# Altium PCB board.PcbDoc (part 1 of 2)
Units mm, origin at the board's own origin, x right, y up, seen from the top; angles counter-clockwise.
Board outline 36 x 151.89 mm, 2 copper layers (Top Layer, Bottom Layer), stack 1.66 mm thick; 112 components, 47 nets, 362 pads, 109 vias.
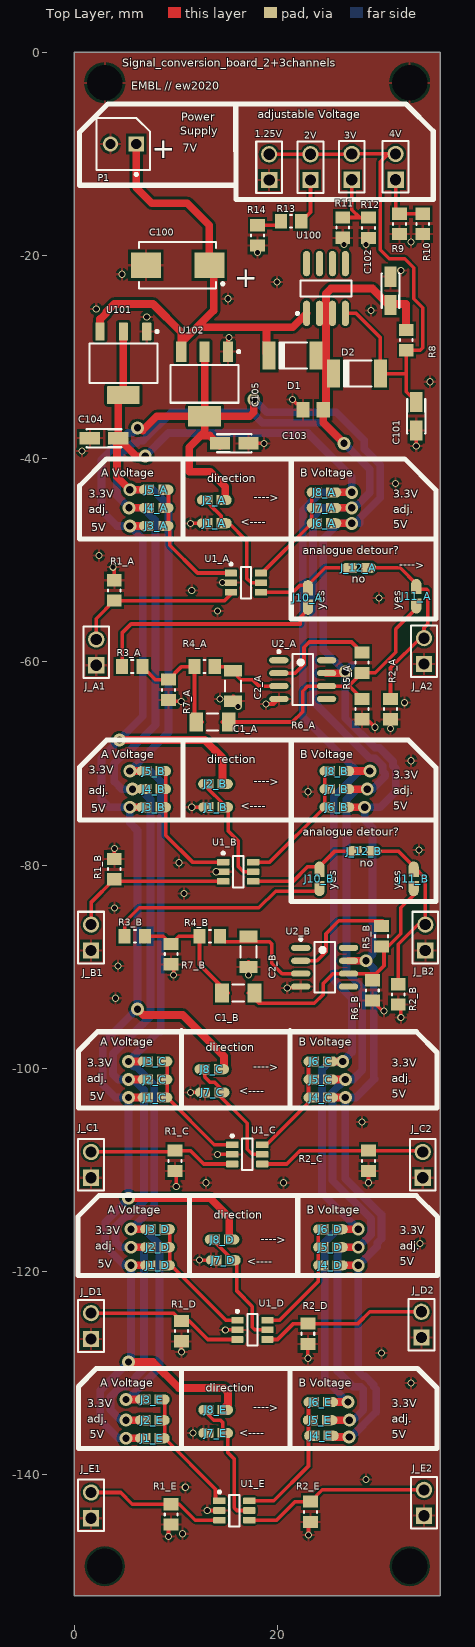
[diagram p0: Top Layer view]
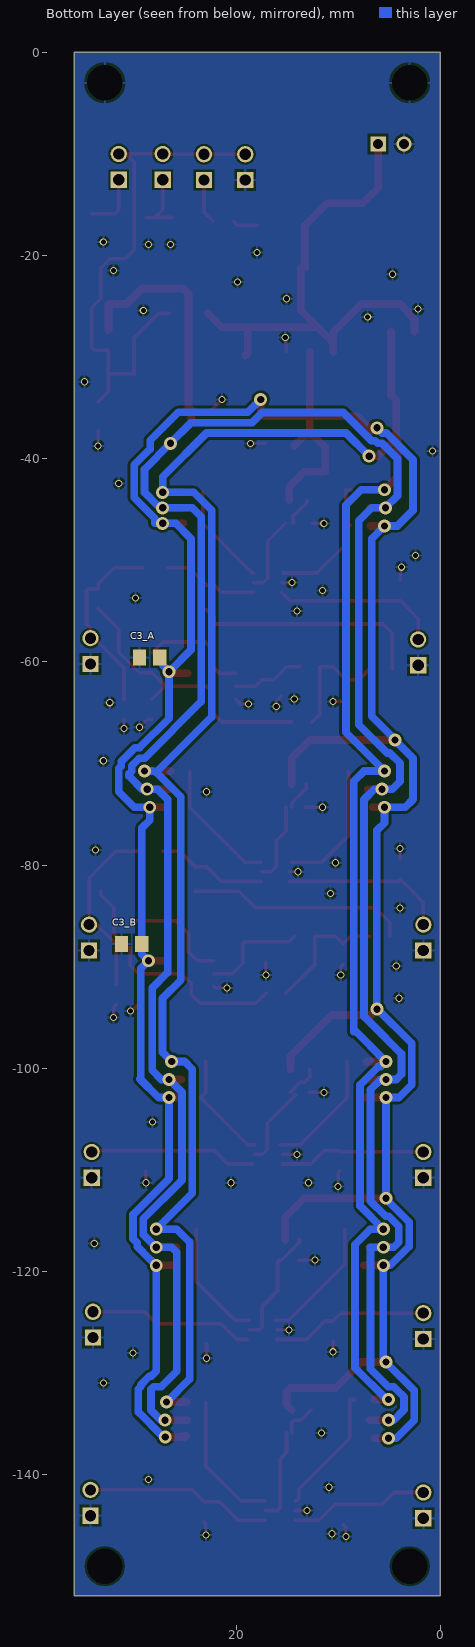
[diagram p1: Bottom Layer view, seen from below]

## Layer stack, top to bottom
Top Solder: solder mask 0.0102, Solder Resist, Dk 3.5
Top Layer: signal copper 0.055
Dielectric1: dielectric 1.55, FR-4, Dk 4.8
Bottom Layer: signal copper 0.055
Bottom Solder: solder mask 0.0102, Solder Resist, Dk 3.5

## Board outline
0,-151.892 0,0 36,0 36,-151.892

## Design rules (kind name [scope] priority, off if disabled: settings)
Clearance clearance_polygons [InNamedPolygon('top_gnd_power')or InNamedPolygon('bottom_gnd_power') vs InNamedPolygon('top_gnd_uc')or InNamedPolygon('bottom_gnd_uc')] p1: gap=1.5 ignorepadtopadclearanceinfootprint=FALSE except(0: Arc-Hole Track-Hole SMDPad-Hole THPad-Hole Via-Hole Fill-Hole Poly-Hole Region-Hole Text-Hole)
Clearance ClearanceRoom [WithinRoom('less')  or WithinRoom('less1') or WithinRoom('less2') or WithinRoom('less3') or WithinRoom('less4')] p2: gap=0.203 ignorepadtopadclearanceinfootprint=FALSE except(0: Arc-Hole Track-Hole SMDPad-Hole THPad-Hole Via-Hole Fill-Hole Poly-Hole Region-Hole Text-Hole)
Clearance clearance_HP_class [InNetClass('high_power_net')] p3: gap=0.381 ignorepadtopadclearanceinfootprint=FALSE except(0: Arc-Hole Track-Hole SMDPad-Hole THPad-Hole Via-Hole Fill-Hole Poly-Hole Region-Hole Text-Hole)
Clearance "clearance_24V class" [InNetClass('24V_net')] p4: gap=0.254 ignorepadtopadclearanceinfootprint=FALSE except(0: Arc-Hole Track-Hole SMDPad-Hole THPad-Hole Via-Hole Fill-Hole Poly-Hole Region-Hole Text-Hole)
Clearance Clearance_1 [All] p5: gap=0.203 ignorepadtopadclearanceinfootprint=FALSE except(0: Arc-Hole Track-Hole SMDPad-Hole THPad-Hole Via-Hole Fill-Hole Poly-Hole Region-Hole Text-Hole)
FabricationTestPointUsage TestPointUsage [All] p1: valid=0 allowmultiple=FALSE
FabricationTestpoint Testpoint [All] p1: side=3 testpointundercomponent=TRUE minsize=1.016 maxsize=2.54 preferedsize=1.524 minholesize=0 maxholesize=1.016 preferedholesize=0.813 testpointgrid=0.025 allowsidetop=TRUE allowsidebottom=TRUE usegrid=TRUE gridtolerance=0
HoleSize [All] p1: absolutevalues=TRUE maxlimit=6 minlimit=0.025 maxpercent=80.000 minpercent=20.000
PolygonConnect PolygonConnect_Power [(InNet('+5V') OR InNet('-24VBUS'))] p1: connectstyle=Relief reliefconductorwidth=2.54 reliefentries=4 polygonreliefangle="90 Angle" airgapwidth=0.254
PolygonConnect [All] p2: connectstyle=Relief reliefconductorwidth=0.254 reliefentries=4 polygonreliefangle="90 Angle" airgapwidth=0.254
RoutingVias [All] p1: holewidth=0.711 width=1.27 viastyle="Through Hole" minholewidth=0.711 minwidth=1.27 maxholewidth=0.711 maxwidth=1.27
SilkToSolderMaskClearance SilkscreenOverComponentPads [IsPad] p1: minsilkscreentomaskgap=0.254 clearancetoexposedcopper=TRUE
SolderMaskExpansion [All] p1: expansion=0.102 istentingtop=FALSE
Width WidthRoom [WithinRoom('less')  or WithinRoom('less1') or WithinRoom('less2') or WithinRoom('less3') or WithinRoom('less4')] p1: maxlimit=0.356 minlimit=0.356 preferedwidth=0.356
Width Width_HC_class [InNetClass('High_Current_net')] p2: maxlimit=15.24 minlimit=1.524 preferedwidth=1.524
Width Width_HP_class [InNetClass('High_Power_net')] p3: maxlimit=1.016 minlimit=1.016 preferedwidth=1.016
Width "Width_24V class" [InNetClass('24V_net')] p4: maxlimit=0.762 minlimit=0.762 preferedwidth=0.762
Width Width_1 [All] p5: maxlimit=0.356 minlimit=0.356 preferedwidth=0.356
26 further rules are at their usual default settings.

## Classes and differential pairs
component class B: C1_B C2_B C3_B J1_B J2_B J3_B J4_B J5_B J6_B J7_B J8_B J10_B J11_B J_12_B R1_B R2_B R3_B R4_B R5_B R6_B R7_B U1_B U2_B
component class A: C1_A C2_A C3_A J1_A J2_A J3_A J4_A J5_A J6_A J7_A J8_A J10_A J11_A J_12_A R1_A R2_A R3_A R4_A R5_A R6_A R7_A U1_A U2_A
channel class Sheet1: Designator Designator2
net class 24V_net: +3,3V +4V +5V +7V
component class sheetPower: 1.25V 2V 3V 4V C100 C101 C102 C103 C104 C105 D1 D2 P1 R8 R9 R10 R11 R12 R13 R14 U100 U101 U102
component class sheet_top: J_A1 J_A2 J_B1 J_B2 J_B6 J_C1 J_C2 J_D1 J_D2 J_E1 J_E2
component class E: J1_E J2_E J3_E J4_E J5_E J6_E J7_E J8_E R1_E R2_E U1_E
component class D: J1_D J2_D J3_D J4_D J5_D J6_D J7_D J8_D R1_D R2_D U1_D
component class C: J1_C J2_C J3_C J4_C J5_C J6_C J7_C J8_C R1_C R2_C U1_C
channel class Sheet2: C D E

## Components (designator, comment, footprint, x,y, rotation, side; value= is the part's Value field where it differs from the comment)
1.25V "61300211121" 61300211121 19.177,-12.573 r90 top
2V "61300211121" 61300211121 23.241,-12.573 r90 top
3V "61300211121" 61300211121 27.305,-12.54 r90 top
4V "61300211121" 61300211121 31.623,-12.54 r90 top
C1_A "2.2uF" CAPC1206(3216)190_M 13.589,-65.913 r0 top (schematic designator C1)
C1_B "2.2uF" CAPC1206(3216)190_M 16.129,-92.583 r0 top (schematic designator C1)
C2_A "1uF" CAPC1206(3216)190_N 15.621,-62.357 r90 top (schematic designator C2)
C2_B "1uF" CAPC1206(3216)190_N 17.145,-88.519 r90 top (schematic designator C2)
C3_A "100nF" CAPC2013X88X50ML20T25 28.591,-59.563 r180 bottom (schematic designator C3)
C3_B "100nF" CAPC2013X88X50ML20T25 30.353,-87.757 r180 bottom (schematic designator C3)
C100 "10 µF" KEMT-520-D_Low 10.16,-20.955 r180 top
C101 "4,7 µF" "A Package" 33.655,-34.411 r270 top
C102 "4,7 µF" "A Package" 31.115,-24.875 r90 top
C103 "100nF" CAPC2013X88X50ML20T25 23.495,-35.179 r0 top
C104 "4,7 µF" "A Package" 4.324,-37.973 r180 top
C105 "4,7 µF" "A Package" 14.345,-38.481 r0 top
D1 "LL4007" LL4007 23.777,-29.845 r180 top
D2 "LL4007" LL4007 30.127,-31.623 r180 top
J1_A "normal solderbridge" PCBComponent 14.986,-46.355 r270 top (schematic designator J1)
J1_B "normal solderbridge" PCBComponent 15.113,-74.295 r270 top (schematic designator J1)
J1_C "normal solderbridge" PCBComponent 9.144,-102.87 r270 top (schematic designator J1)
J1_D "normal solderbridge" PCBComponent 9.398,-119.38 r270 top (schematic designator J1)
J1_E "normal solderbridge" PCBComponent 8.89,-136.398 r270 top (schematic designator J1)
J2_A "normal solderbridge" PCBComponent 14.986,-44.069 r270 top (schematic designator J2)
J2_B "normal solderbridge" PCBComponent 15.097,-72.009 r270 top (schematic designator J2)
J2_C "normal solderbridge" PCBComponent 6.731,-101.092 r90 top (schematic designator J2)
J2_D "normal solderbridge" PCBComponent 6.985,-117.602 r90 top (schematic designator J2)
J2_E "normal solderbridge" PCBComponent 6.477,-134.62 r90 top (schematic designator J2)
J3_A "normal solderbridge" PCBComponent 9.271,-46.609 r270 top (schematic designator J3)
J3_B "normal solderbridge" PCBComponent 9.017,-74.295 r270 top (schematic designator J3)
J3_C "normal solderbridge" PCBComponent 9.144,-99.314 r270 top (schematic designator J3)
J3_D "normal solderbridge" PCBComponent 9.398,-115.824 r270 top (schematic designator J3)
J3_E "normal solderbridge" PCBComponent 8.89,-132.588 r270 top (schematic designator J3)
J4_A "normal solderbridge" PCBComponent 6.858,-44.831 r90 top (schematic designator J4)
J4_B "normal solderbridge" PCBComponent 6.604,-72.517 r90 top (schematic designator J4)
J4_C "normal solderbridge" PCBComponent 23.051,-102.87 r90 top (schematic designator J4)
J4_D "normal solderbridge" PCBComponent 24.003,-119.38 r90 top (schematic designator J4)
J4_E "normal solderbridge" PCBComponent 23.114,-136.144 r90 top (schematic designator J4)
J5_A "normal solderbridge" PCBComponent 9.271,-43.053 r270 top (schematic designator J5)
J5_B "normal solderbridge" PCBComponent 9.017,-70.739 r270 top (schematic designator J5)
J5_C "normal solderbridge" PCBComponent 25.464,-101.092 r270 top (schematic designator J5)
J5_D "normal solderbridge" PCBComponent 26.416,-117.602 r270 top (schematic designator J5)
J5_E "normal solderbridge" PCBComponent 25.4,-134.62 r270 top (schematic designator J5)
J6_A "normal solderbridge" PCBComponent 23.368,-46.355 r90 top (schematic designator J6)
J6_B "normal solderbridge" PCBComponent 24.638,-74.295 r90 top (schematic designator J6)
J6_C "normal solderbridge" PCBComponent 23.051,-99.314 r90 top (schematic designator J6)
J6_D "normal solderbridge" PCBComponent 24.003,-115.824 r90 top (schematic designator J6)
J6_E "normal solderbridge" PCBComponent 23.051,-132.842 r90 top (schematic designator J6)
J7_A "normal solderbridge" PCBComponent 25.781,-44.831 r270 top (schematic designator J7)
J7_B "normal solderbridge" PCBComponent 27.051,-72.517 r270 top (schematic designator J7)
J7_C "normal solderbridge" PCBComponent 14.781,-102.362 r270 top (schematic designator J7)
J7_D "normal solderbridge" PCBComponent 15.875,-118.872 r270 top (schematic designator J7)
J7_E "normal solderbridge" PCBComponent 15.113,-135.89 r270 top (schematic designator J7)
J8_A "normal solderbridge" PCBComponent 23.368,-43.307 r90 top (schematic designator J8)
J8_B "normal solderbridge" PCBComponent 24.638,-70.739 r90 top (schematic designator J8)
J8_C "normal solderbridge" PCBComponent 14.732,-100.076 r270 top (schematic designator J8)
J8_D "normal solderbridge" PCBComponent 15.748,-116.84 r270 top (schematic designator J8)
J8_E "normal solderbridge" PCBComponent 15.113,-133.604 r270 top (schematic designator J8)
J10_A "normal solderbridge" PCBComponent 22.987,-54.864 r180 top (schematic designator J10)
J10_B "normal solderbridge" PCBComponent 24.13,-82.55 r180 top (schematic designator J10)
J11_A "normal solderbridge" PCBComponent 33.655,-54.737 r180 top (schematic designator J11)
J11_B "normal solderbridge" PCBComponent 33.401,-82.55 r180 top (schematic designator J11)
J_12_A "normal solderbridge" PCBComponent 29.21,-50.739 r270 top (schematic designator J_12)
J_12_B "normal solderbridge" PCBComponent 29.718,-78.613 r270 top (schematic designator J_12)
J_A1 "61300211121" 61300211121 2.159,-60.325 r90 top
J_A2 "61300211121" 61300211121 34.417,-60.198 r90 top
J_B1 "61300211121" 61300211121 1.651,-88.392 r90 top
J_B2 "61300211121" 61300211121 34.544,-88.392 r90 top
J_C1 "61300211121" 61300211121 1.651,-110.76 r90 top
J_C2 "61300211121" 61300211121 34.29,-110.76 r90 top
J_D1 "61300211121" 61300211121 1.651,-126.623 r90 top
J_D2 "61300211121" 61300211121 34.163,-126.492 r90 top
J_E1 "61300211121" 61300211121 1.651,-144.272 r90 top
J_E2 "61300211121" 61300211121 34.417,-144.018 r90 top
P1 "12V" 66100211622 6.096,-9.017 r0 top
R1_A "10k" YAGO-RC0805_M 3.937,-52.959 r270 top (schematic designator R1)
R1_B "10k" YAGO-RC0805_M 3.937,-80.391 r270 top (schematic designator R1)
R1_C "10k" YAGO-RC0805_M 9.906,-109.093 r90 top (schematic designator R1)
R1_D "10k" YAGO-RC0805_M 10.541,-125.857 r90 top (schematic designator R1)
R1_E "10k" YAGO-RC0805_M 9.525,-143.891 r90 top (schematic designator R1)
R2_A "10k" YAGO-RC0805_M 31.115,-64.643 r90 top (schematic designator R2)
R2_B "10k" YAGO-RC0805_M 31.877,-92.71 r90 top (schematic designator R2)
R2_C "10k" YAGO-RC0805_M 28.956,-109.093 r90 top (schematic designator R2)
R2_D "10k" YAGO-RC0805_M 22.987,-126.111 r90 top (schematic designator R2)
R2_E "10k" YAGO-RC0805_M 23.241,-143.637 r90 top (schematic designator R2)
R3_A "10k" YAGO-RC0805_M 5.699,-60.452 r180 top (schematic designator R3)
R3_B "10k" YAGO-RC0805_M 5.953,-86.995 r180 top (schematic designator R3)
R4_A "10k" YAGO-RC0805_M 12.827,-60.452 r180 top (schematic designator R4)
R4_B "10k" YAGO-RC0805_M 13.335,-86.995 r180 top (schematic designator R4)
R5_A "0" YAGO-RC0805_M 28.321,-60.071 r270 top (schematic designator R5)
R5_B "0" YAGO-RC0805_M 30.226,-86.995 r270 top (schematic designator R5)
R6_A "open" YAGO-RC0805_M 28.321,-64.643 r270 top (schematic designator R6)
R6_B "open" YAGO-RC0805_M 29.337,-92.329 r270 top (schematic designator R6)
R7_A "open" YAGO-RC0805_M 9.271,-62.738 r270 top (schematic designator R7)
R7_B "open" YAGO-RC0805_M 9.525,-88.757 r270 top (schematic designator R7)
R8 "1k" YAGO-RC0805_M 32.655,-28.321 r90 top
R9 "56k" YAGO-RC0805_M 32.004,-16.891 r90 top
R10 "2k7" YAGO-RC0805_M 34.29,-16.891 r90 top
R11 "2k7" YAGO-RC0805_M 26.416,-17.256 r90 top
R12 "2k7" YAGO-RC0805_M 28.956,-17.272 r90 top
R13 "560" YAGO-RC0805_M 21.336,-16.637 r0 top
R14 "15" YAGO-RC0805_M 18.034,-18.018 r90 top
U1_A "SN74LVC1T45DBVT" DBV0006A_M 16.891,-52.197 r0 top (schematic designator U1)
U1_B "SN74LVC1T45DBVT" DBV0006A_M 16.129,-80.645 r0 top (schematic designator U1)
U1_C "SN74LVC1T45DBVT" DBV0006A_M 17.018,-108.458 r0 top (schematic designator U1)
U1_D "SN74LVC1T45DBVT" DBV0006A_M 17.526,-125.73 r0 top (schematic designator U1)
U1_E "SN74LVC1T45DBVT" DBV0006A_M 15.748,-143.51 r0 top (schematic designator U1)
U2_A "AD8029ARZ" ADI-R-8_L 22.479,-61.738 r0 top (schematic designator U2)
U2_B "AD8029ARZ" ADI-R-8_L 24.638,-90.043 r0 top (schematic designator U2)
U100 "LM317LM" M08A_M 24.765,-23.241 r90 top
U101 "LM1117IMP-3.3/NOPB" DCY0004A_N 4.826,-30.607 r270 top
U102 "LM1117IMP-5.0/NOPB" DCY0004A_M 12.827,-32.639 r270 top

## Footprints (in the part's own frame and the unit in brackets; to place one, negate y for a bottom-side part, rotate by r counter-clockwise, add the part's x,y. Pads: shape width x height; smd on the part's side, far side on the other; paste and mask are expansions set on the pad)
61300211121 [mm] "2Pol; gerade; WR-PHD 2.54 mm THT Pin Header"
  rect 1.6x1.6 hole 1.1: 1(0,0)
  round 1.6 hole 1.1: 2(2.54,0)
  silkscreen extent -1.27,-1.27 3.81,1.27, body extent -1.27,-1.27 3.81,1.27, height 8.57
66100211622 [mm] "2 Pins, stehend 2.54mm Intercom Stiftleiste WR-WTB"
  rect 1.5x1.5 hole 1: 1(0,0)
  round 1.5 hole 1: 2(-2.54,0)
  silkscreen extent -3.91,-3.12 1.37,2.55, body extent -3.66,-2.5 1.12,2.5, height 11.33
"A Package" [mm] "A Package; Low Density"
  rect 2x1.2 smd: 1(0,0) 2(2.8,0)
  silkscreen extent -0.3,-0.9 3.1,0.9
ADI-R-8_L [mm] "SOIC, 8-Leads, Body 4.9x3.9mm, Pitch 1.27mm, IPC High Density"
  oval 1.9x0.6 smd: 1(-2.35,1.905) 2(-2.35,0.635) 3(-2.35,-0.635) 4(-2.35,-1.905) 5(2.35,-1.905) 6(2.35,-0.635) 7(2.35,0.635) 8(2.35,1.905)
  silkscreen extent -2.47,-2.5 1,2.88, body extent -2,-2.5 2,2.5, height 1.75
CAPC1206(3216)190_M [mm] "Chip Capacitor, Body 3.2x1.6mm, Height 1.9mm, IPC Low Density"
  rect 1.35x1.9 smd: 1(-1.6,0) 2(1.6,0)
  silkscreen extent -0.55,-0.85 0.55,0.85, body extent -1.7,-0.9 1.7,0.9, height 1.9
CAPC1206(3216)190_N [mm] "Chip Capacitor, Body 3.2x1.6mm, Height 1.9mm, IPC Medium Density"
  rect 1.15x1.8 smd: 1(-1.5,0) 2(1.5,0)
  silkscreen extent -0.55,-0.8 0.55,0.8, body extent -1.7,-0.9 1.7,0.9, height 1.9
CAPC2013X88X50ML20T25 [mm] "Chip Capacitor, 2-Leads, Body 2.00x1.25mm, IPC Low Density"
  rect 1.3x1.55 smd: 1(-1,0) 2(1,0)
  body extent -1.1,-0.72 1.1,0.72, height 0.88
DBV0006A_M [mm] "SOT23, 6-Leads, Body 3.05x1.75mm, Pitch 0.95mm, IPC Low Density"
  rrect15% 1.2x0.65 smd: 1(-1.475,0.95) 2(-1.475,0) 3(-1.475,-0.95) 4(1.475,-0.95) 5(1.475,0) 6(1.475,0.95)
  silkscreen extent -1.6,-1.55 0.5,1.95, body extent -1.42,-1.46 1.42,1.46, height 1.11
DCY0004A_M [mm] "SOT223, 4-Leads, Body 6.7x3.7mm, Pitch 2.3mm, IPC Low Density"
  rrect10% 2.05x1 smd: 1(-3.175,2.3) 2(-3.175,0) 3(-3.175,-2.3)
  rrect5% 2.05x3.25 smd: 4(3.175,0)
  silkscreen extent -3.3,-3.35 1.85,3.48, body extent -3.5,-3.25 3.5,3.25, height 1.62
DCY0004A_N [mm] "SOT223, 4-Leads, Body 6.7x3.7mm, Pitch 2.3mm, IPC Medium Density"
  rrect11% 1.75x0.9 smd: 1(-3.125,2.3) 2(-3.125,0) 3(-3.125,-2.3)
  rrect6% 1.75x3.2 smd: 4(3.125,0)
  silkscreen extent -3.25,-3.35 1.95,3.43, body extent -3.5,-3.25 3.5,3.25, height 1.62
KEMT-520-D_Low [mm] "Molded Capacitor, 2-Leads, Body 7.6x4.6mm, IPC Low Density"
  rect 2.95x2.55 smd: 1(-3.125,0) 2(3.125,0)
  silkscreen extent -4.58,-2.3 3.8,2.3, body extent -4.02,-2.3 4.02,2.3, height 3.1
LL4007 [mm] "MELF Diode, 2-Leads, Body 5,00x2,50mm, IPC High Density"
  rect 1.279x2.75 smd: 1(0,0) 2(4.6,0)
  silkscreen extent 0.9,-1.28 3.57,1.28, body extent -0.3,-1.34 4.9,1.35, height 2.69
M08A_M [mm] "SOIC, 8-Leads, Body 4.9x3.9mm, Pitch 1.27mm, IPC Low Density"
  oval 2.5x0.7 smd: 1(-2.45,1.905) 2(-2.45,0.635) 3(-2.45,-0.635) 4(-2.45,-1.905) 5(2.45,-1.905) 6(2.45,-0.635) 7(2.45,0.635) 8(2.45,1.905)
  silkscreen extent -2.57,-2.5 0.8,2.93, body extent -2,-2.5 2,2.5, height 1.75
PCBComponent [mm]
  round 1 smd paste+0: 1(0,0) 2(0,-2.413)
  rect 1x1 smd paste+0: 1(0,-0.508) 2(0,-1.905)
YAGO-RC0805_M [mm] "Chip Resistor, 2-Leads, Body 2.00x1.25mm, IPC Low Density"
  rect 1.2x1.45 smd: 1(-1,0) 2(1,0)
  silkscreen extent -0.1,-0.63 0.1,0.63, body extent -1,-0.62 1,0.63, height 0.6

## Part data
1.25V 2V 3V 4V J_A1 J_A2 J_B1 J_B2 J_C1 J_C2 J_D1 J_D2 J_E1 J_E2: library part CMP-001-0071-1, "2Pol; gerade; WR-PHD 2.54 mm THT Pin Header", Current Rating="3 A", Flammability Rating="UL 94 V-0", Insulation Resistance="1 GOhms", Manufacturer="Wurth Electronics", Supplier Part Number=710-61300211121, Voltage Rating="250 V", Accessory Type=-, Application="Wire to Board", Brand="Wurth Electronics", ComponentLink1Description=6130xx11121-538006.pdf, ComponentLink1URL=http://www.mouser.com/ds/2/445/6130xx11121-538006.pdf, Contact Gender="Pin (Male)", Contact Material="Copper Alloy", Contact Plating=Gold, Contact Type=-, Housing Gender=-, Housing Material="Polybutylene Terephthalate (PBT)", Latching Type=Unlatched, Manufacturer Part Number=61300211121, Mating Post Length="6 mm", Minimum Order Quantity=1, Mounting Angle=Straight, Mounting Style="Straight Pin", Number of Positions="2 Position", Number of Rows="1 Row", Packaging=Bulk, PartNumber=61300211121, Pitch="2.54 mm", Product=Headers, Reeling=False, RoHS - Mouser=Y, Row Spacing=-, Series=WR-PHD, Standard Pack Qty=1000, Supplier=Mouser, Termination Post Length="3 mm", Termination Style="Through Hole", Type="Pin Strip"
C1_A C1_B: library part CMP-001-0162-A.1, "CAP CER 2.2UF 10V X7R 1206", Case/Package=1206, Case Code (Metric)=3216, Manufacturer="Wurth Electronics", Max Operating Temperature=125°C, Min Operating Temperature=-55°C, PartNumber=885012208015, Supplier Part Number=710-885012208015, Tolerance=10%, Voltage Rating=10V, Capacitance=2.2uF, Case Code (Imperial)=1206, ComponentLink1Description=885012208015.pdf?src-supplier=Digi-Key, ComponentLink1URL=https://katalog.we-online.de/pbs/datasheet/885012208015.pdf?src-supplier=Digi-Key, ComponentLink2Description=2031893.pdf?src-supplier=Farnell, ComponentLink2URL=http://www.farnell.com/datasheets/2031893.pdf?src-supplier=Farnell, Length=0.126inch, Mount="Surface Mount", Packaging="Tape and Reel", Supplier=Mouser, Thickness=0.051inch, Width=0.063inch
C2_A C2_B: library part CMP-001-0138-A.2, "CAP CER 1UF 10V X7R 1206", Manufacturer="Wurth Electronics Inc.", Manufacturer Part Number=885012208013, Operating Temperature="-55°C ~ 125°C", Package / Case="1206 (3216 Metric)", Ratings=-, Supplier Part Number=732-7685-1-ND, Temperature Coefficient=X7R, Tolerance=±10%, Voltage - Rated=10V, Applications="General Purpose", ComponentLink1Description=885012208013.pdf, ComponentLink1URL=http://katalog.we-online.de/pbs/datasheet/885012208013.pdf, Features=-, Height - Seated (Max)=-, Lead Spacing=-, Lead Style=-, Mounting Type="Surface Mount, MLCC", Notification="Current market demand for these product types have resulted in fluctuating and extending lead times. Lead times may differ.", Packaging="Cut Tape (CT)", PartNumber=885012208013, Part Status=Active, Size / Dimension="0.126\" L x 0.063\" W (3.20mm x 1.60mm)", Supplier=Digi-Key, Thickness (Max)="0.051\" (1.30mm)"
C3_A C3_B C103: library part CMP-001-0082-2, "generic 0805 COG oder X7R Vielschichtkondensatoren max. +/-10%"
C100: library part CMP-001-0033-3, "10 µF, 35V, 125 mOhm, Gr. D / partnumb: T495D106K035ATE125", Capacitance=10µF, ESR (Equivalent Series Resistance)="125 mOhm", Lifetime @ Temp.="2000 Hrs @ 85°C", Manufacturer=KEMET, Manufacturer Size Code=D, Operating Temperature="-55°C ~ 125°C", Package / Case="2917 (7343 Metric)", PartNumber=T495D106K035ATE125, Supplier Part Number=399-10292-1-ND, Tolerance=±10%, Voltage - Rated=35V, ComponentLink1Description=docfinder?Partnumber=T495D106K035ATE300, ComponentLink1URL=http://www.kemet.com/docfinder?Partnumber=T495D106K035ATE300, Failure Rate=-, Features="General Purpose", Height - Seated (Max)="0.122\" (3.10mm)", Lead Spacing=-, Mounting Type="Surface Mount", Packaging="Cut Tape (CT)", Part Status=Active, Size / Dimension="0.287\" L x 0.169\" W (7.30mm x 4.30mm)", Supplier=Digi-Key, Type=Molded
C101 C102 C104 C105: library part CMP-001-0039-3, "4,7 µF; 6V; Gr. A; T491A475K006AT", Capacitance=4.7µF, ESR (Equivalent Series Resistance)="6 Ohm", Lifetime @ Temp.="2000 Hrs @ 85°C", Manufacturer=KEMET, Manufacturer Size Code=A, Operating Temperature="-55°C ~ 125°C", Package / Case="1206 (3216 Metric)", PartNumber=T491A475K006AT, Supplier Part Number=399-9717-1-ND, Tolerance=±10%, Voltage - Rated=6.3V, ComponentLink1Description=KEM_T2005_T491.pdf, ComponentLink1URL=http://www.kemet.com/Lists/ProductCatalog/Attachments/254/KEM_T2005_T491.pdf, Failure Rate=-, Features="General Purpose", Height - Seated (Max)="0.071\" (1.80mm)", Lead Spacing=-, Mounting Type="Surface Mount", Packaging="Cut Tape (CT)", Part Status=Active, Size / Dimension="0.126\" L x 0.063\" W (3.20mm x 1.60mm)", Supplier=Digi-Key, Type=Molded
D1 D2: library part CMP-001-0049-2, "LL4007;  Vf 1,1V @ 1A, If = 1A", Betriebstemperatur, max.=175, Manufacturer="TAIWAN SEMICONDUCTOR", PartNumber="LL4007G L2", Supplier Part Number=2677381, Anzahl der Pins=-, Bauform - Diode=DO-213, ComponentLink1Description=2182652.pdf, ComponentLink1URL=http://www.farnell.com/datasheets/2182652.pdf, Diodenkonfiguration=Einfach, Durchlassspannung Vf max.=1.1, Durchlassstrom (mittlerer) If(AV)=1, Periodische Sperrspannung Vrrm, max.=1, Produktpalette=-, Sperrerholzeit Trr, max.=-, Spitzendurchlassstrom Ifsm, max.=25, Supplier=Farnell, SVHC="No SVHC (20-Jun-2016", Verpackung=Gurtabschnitt
J1_A J1_B J1_C J1_D J1_E J2_A J2_B J2_C J2_D J2_E J3_A J3_B J3_C J3_D J3_E J4_A J4_B J4_C J4_D J4_E J5_A J5_B J5_C J5_D J5_E J6_A J6_B J6_C J6_D J6_E J7_A J7_B J7_C J7_D J7_E J8_A J8_B J8_C J8_D J8_E J10_A J10_B J11_A J11_B J_12_A J_12_B: library part CMP-001-0133-A.1
P1: library part CMP-001-0161-A.3, "WR-WTB 2.54 mm Male Vertical Shrouded Header 2 Pins", Manufacturer="Wurth Electronics", PartNumber=66100211622, Supplier Part Number=732-14102-ND, Supplier=Digi-Key
R1_A R1_B R1_C R1_D R1_E R2_A R2_B R2_C R2_D R2_E R3_A R3_B R4_A R4_B R5_A R5_B R6_A R6_B R7_A R7_B R8 R9 R10 R11 R12 R13 R14: library part CMP-001-0027-2, "0805 Yageo Standard BlackBox Resistors", Manufacturer=Yageo, Operating Temperature="-55°C ~ 155°C", Package / Case="0805 (2012 Metric)", Power (Watts)="0.125W, 1/8W", Supplier Device Package=0805, Temperature Coefficient=±200ppm/°C, Tolerance=±1%, ComponentLink1Description=PYu-RC_Group_51_RoHS_L_7.pdf, ComponentLink1URL=http://www.yageo.com/documents/recent/PYu-RC_Group_51_RoHS_L_7.pdf, Composition="Thick Film", Failure Rate=-, Features="Moisture Resistant", Height - Seated (Max)="0.024\" (0.60mm)", Packaging=Digi-Reel®, Part Status=Active, Size / Dimension="0.079\" L x 0.049\" W (2.00mm x 1.25mm)"
U1_A U1_B U1_C U1_D U1_E: library part CMP-00491-2, "Single-Bit Dual-Supply Bus Transceiver with Configurable Voltage Translation and 3-State Outputs, DBV0006A, SMALL T&R", F @ Nom Voltage(Max)(Mhz)=150, Generic Part Number=SN74LVC1T45, ICC @ Nom Voltage(Max)(mA)=0.004, Manufacturer="Texas Instruments", Operating Temperature Range(C)="-40 to 85", PartNumber=SN74LVC1T45DBVTG4, Rating=Catalog, tpd @ Nom Voltage(Max)(ns)=15.5,8,5.8,4.4, Voltage(Nom)(V)=1.8,2.5,3.3,5, 3-State Output=Yes, Bits(#)=1, DatasheetVersion=SCES515K, Input Type=CMOS/TTL, Logic=True, Output Drive (IOL/IOH)(Max)(mA)=32/-32, Output Type=CMOS, PackageReference=DBV0006A, Schmitt Trigger=No, Sub-Family="Dual Supply Translator", Technology Family=LVC, VCC(Max)(V)=5.5, VCC(Min)(V)=1.65
U2_A U2_B: library part CMP-00480-1, "Single Channel RRIO Operational Amplifier, 125 MHz BW, 62 V/us SR, Industrial, 8-pin SOIC (R-8), Tube", Amplifiers Per Package=1, Generic Part Number=AD8029, Input Bias Current=700nA, Input Offset Voltage=1.6mV, Manufacturer="Analog Devices", Code_JEDEC=MS-012-AA, ComponentLink1Description="Manufacturer URL", ComponentLink1URL=http://www.analog.com/en/index.html, ComponentLink2Description=Datasheet, ComponentLink2URL=http://www.analog.com/static/imported-files/data_sheets/AD8029_8030_8040.pdf, ComponentLink3Description="Package Specification", ComponentLink3URL=http://www.analog.com/static/imported-files/packages/PKG_PDF/SOIC_Narrow%20(R)/R_8.pdf, DatasheetVersion="Rev. B", Iq/Amp=1.5mA, Mounting Technology="Surface Mount", PackageDescription="8-Pin Standard Small Outline Package, Body 3.9 x 4.9 mm, Pitch 1.27 mm", PackageReference=R-8, PackageVersion=060506-A, PartNumber=AD8029ARZ, Slew Rate=62V/us, Small Signal Bandwidth=125MHz, V Span Max=12V, V Span Min=2.7V
U100: library part CMP-001-0042-1, "LM317LM/NOPB; 8PIN SOIC; 0,1A", Input Voltage MAX="40 V", Input Voltage MIN="4.2 V", Manufacturer="Texas Instruments", Maximum Operating Temperature="+ 125 C", Minimum Operating Temperature="- 40 C", Operating Temperature Range="- 40 C to + 125 C", Output Current="100 mA", Output Voltage="1.2 V to 37 V", Package/Case="SOIC-8 Narrow", PartNumber=LM317LM/NOPB, Supplier Part Number=926-LM317LM/NOPB, Brand="Texas Instruments", Line Regulation="0.04 % / V", Load Regulation="0.5 %", Minimum Order Quantity=1, Mounting Style=SMD/SMT, Number of Outputs=1, Output Type=Adjustable, Packaging=Tube, Polarity=Positive, PSRR / Ripple Rejection - Typ="80 dB", Reeling=False, RoHS - Mouser=Y, Series=LM317L-N, Standard Pack Qty=95, Supplier=Mouser
U101: library part CMP-00484-1, "800mA Low-Dropout Linear Regulator, 4-pin SOT-223, Pb-Free", Manufacturer="Texas Instruments", PackageTopMarking=XYTT*N05B, PowerWise=N, Code_IPC=SOT223-4, Code_JEDEC=TO-261-AA, ComponentLink1Description="Datasheet URL", ComponentLink1URL=http://www.ti.com/general/docs/lit/getliterature.tsp?genericPartNumber=LM1117-N&fileType=pdf, CompType="LDO IC", High-Reliability=Y, PackageDescription="Molded SOT-223, 6.50 x 3.56 x 1.6mm Body, 4 Lead, 2.3mm Pitch", PackageReference=DCY0004A, PartNumber=LM1117IMP-3.3/NOPB, PinCount=4, RoHS=Y
U102: library part CMP-00485-1, "800mA Low-Dropout Linear Regulator, 4-pin SOT-223, Pb-Free", Manufacturer="Texas Instruments", PackageTopMarking=XYTT*N06B, PowerWise=N, Code_IPC=SOT223-4, Code_JEDEC=TO-261-AA, ComponentLink1Description="Datasheet URL", ComponentLink1URL=http://www.ti.com/general/docs/lit/getliterature.tsp?genericPartNumber=LM1117-N&fileType=pdf, CompType="LDO IC", High-Reliability=Y, PackageDescription="Molded SOT-223, 6.50 x 3.56 x 1.6mm Body, 4 Lead, 2.3mm Pitch", PackageReference=DCY0004A, PartNumber=LM1117IMP-5.0/NOPB, PinCount=4, RoHS=Y

## Free pads (board coordinates)
  round 3.302 hole 3.505 unplated: 0(3,-149) 0(3,-3) 0(33,-149) 0(33,-3)

## Via types
v1: diameter 0.7, hole 0.5, Top Layer to Bottom Layer, 69 vias
v2: diameter 1.27, hole 0.711, Top Layer to Bottom Layer, 40 vias

## Nets (pads, with @x,y where several pads share a name; then routed paths per layer and width w, separated by ;. In a path a pad name is that pad's centre, name@x,y a point inside that pad or via, vN(x,y) a via of type N, cw(c..) or ccw(c..) an arc to the next point about the centre after c; other vN are vias at no path point)
+3,3V: C104.1 J3_C.2 J3_D.2 J3_E.2 J5_A.2 J5_B.2 J6_C.2 J6_D.2 J6_E.2 J8_A.2 J8_B.2 U101.2 U101.4 | length 270.2
  Top Layer w0.762: U101.2 U101.4 4.324,-34.234 C104.1 ; v2(5.08,-132.588) J3_E.2@6.477,-132.588 ; v2(5.334,-99.314) 6.731,-99.314 J3_C.2@7.239,-99.314 ; v2(5.461,-70.739) 6.604,-70.739 J5_B.2@7.112,-70.739 ; v2(5.588,-115.824) J3_D.2@6.985,-115.824 ; J5_A.2@6.858,-43.053 v2(5.461,-43.053) 4.191,-41.783 4.191,-38.106 C104.1 ; v2(6.979,-39.745) 6.096,-39.745 C104.1 ; J6_E.2@24.956,-132.842 25.464,-132.842 v2(26.924,-132.842) ; J8_A.2@25.273,-43.307 25.781,-43.307 v2(27.305,-43.307) ; J6_C.2@25.464,-99.314 v2(26.416,-99.314) ; J6_D.2@25.908,-115.824 26.416,-115.824 v2(27.94,-115.824) ; J8_B.2@26.543,-70.739 27.051,-70.739 v2(29.083,-70.739)
  Bottom Layer w0.762: v2(5.08,-132.588) 5.265,-132.588 8.382,-129.471 8.382,-117.348 6.858,-115.824 v2(5.588,-115.824) 7.874,-113.538 7.874,-101.6 6.096,-99.822 5.842,-99.822 v2(5.334,-99.314) 8.509,-96.139 ; v2(5.461,-43.053) 7.747,-43.053 9.271,-44.577 9.271,-66.929 v2(5.461,-70.739) 7.493,-70.739 8.509,-71.755 8.509,-96.139 ; v2(6.979,-39.745) 9.259,-37.465 22.987,-37.465 27.305,-41.783 v2(27.305,-43.307) 24.257,-43.307 22.479,-45.085 22.479,-65.405 27.94,-70.866 25.527,-73.279 25.527,-91.313 27.321,-93.107 27.321,-98.409 v2(26.416,-99.314) 25.146,-99.314 24.384,-100.076 24.384,-112.268 v2(27.94,-115.824) 25.908,-115.824 24.638,-117.094 24.638,-130.556 v2(26.924,-132.842) ; 8.509,-96.393 8.509,-96.139 ; 28.321,-70.739 v2(29.083,-70.739)
+4V: C102.1 C103.2 D1.1 D2.2 J2_C.1 J2_D.1 J2_E.1 J4_A.1 J4_B.1 J5_C.1 J5_D.1 J5_E.1 J7_A.1 J7_B.1 R8.2 U100.2 U100.3 | length 297.3
  Top Layer w0.762: v2(5.08,-134.62) 6.477,-134.62 J2_E.1@6.985,-134.62 ; v2(5.334,-101.092) 6.731,-101.092 J2_C.1@7.239,-101.092 ; v2(5.384,-44.831) J4_A.1@6.858,-44.831 ; v2(5.588,-117.602) J2_D.1@6.985,-117.602 ; v2(5.715,-72.517) 6.604,-72.517 J4_B.1@7.112,-72.517 ; J5_E.1@24.892,-134.62 25.4,-134.62 v2(27.067,-134.62) ; J7_A.1@25.273,-44.831 25.781,-44.831 v2(27.305,-44.831) ; J5_C.1@25.464,-101.092 v2(26.67,-101.092) ; J5_D.1@25.908,-117.602 26.416,-117.602 v2(27.94,-117.602) ; J7_B.1@26.543,-72.517 27.051,-72.517 v2(28.829,-72.517) ; v2(26.543,-38.481) 24.495,-36.433 C103.2 24.765,-34.909 24.765,-29.845 24.765,-23.749 25.273,-23.241 29.337,-23.241 30.861,-24.765 32.639,-24.765 32.639,-27.305 R8.2
  Bottom Layer w0.762: v2(5.08,-134.62) 4.572,-134.62 3.556,-133.604 3.556,-132.334 3.81,-132.08 3.81,-132.062 4.554,-131.318 5.098,-131.318 6.858,-129.558 6.858,-117.602 v2(5.588,-117.602) 4.572,-117.602 4.064,-117.094 4.064,-115.552 5.062,-114.554 5.352,-114.554 6.858,-113.048 6.858,-102.108 5.842,-101.092 v2(5.334,-101.092) 4.318,-101.092 3.81,-100.584 3.81,-98.552 6.731,-95.631 ; 6.749,-95.631 6.731,-95.631 ; 7.493,-94.887 7.493,-94.869 ; v2(27.067,-134.62) 27.464,-134.62 28.448,-133.636 28.448,-131.572 28.194,-131.318 27.432,-131.318 25.908,-129.794 25.908,-118.11 26.416,-117.602 v2(27.94,-117.602) 27.958,-117.602 29.21,-116.35 29.21,-114.808 25.4,-110.998 25.4,-102.344 26.652,-101.092 v2(26.67,-101.092) 27.432,-101.092 28.337,-100.187 28.337,-92.091 26.797,-90.551 26.797,-73.533 27.813,-72.517 v2(28.829,-72.517) 29.337,-72.517 30.607,-71.247 30.607,-70.993 30.353,-70.739 30.353,-70.213 29.609,-69.469 29.083,-69.469 23.495,-63.881 23.495,-45.72 24.384,-44.831 v2(27.305,-44.831) 27.559,-44.577 27.831,-44.577 29.083,-43.325 29.083,-41.021 v2(26.543,-38.481) 24.511,-36.449 18.507,-36.449 17.509,-35.451 9.525,-35.451 6.749,-38.227 6.39,-38.227 6.142,-38.475 5.721,-38.475 4.191,-40.005 4.191,-43.638 v2(5.384,-44.831) 6.731,-44.831 8.001,-46.101 8.001,-66.167 5.207,-68.961 4.953,-68.961 3.937,-69.977 3.937,-71.755 4.699,-72.517 v2(5.715,-72.517) 6.477,-72.517 7.493,-73.533 7.493,-94.869 ; 6.731,-95.631 7.493,-94.869
+5V: C3_A.2 C3_B.2 C105.1 J1_C.2 J1_D.2 J1_E.2 J2_A.1 J2_B.1 J3_A.2 J3_B.2 J4_C.2 J4_D.2 J4_E.2 J6_A.2 J6_B.2 J8_C.1 J8_D.1 J8_E.1 U2_A.7 U2_B.7 U102.2 U102.4 | length 349.4
  Top Layer w0.762: v2(4.445,-67.691) 12.827,-67.691 14.589,-69.453 J2_B.1@14.589,-72.009 ; v2(5.08,-136.398) J1_E.2@6.477,-136.398 ; v2(5.334,-128.905) 7.747,-128.905 10.287,-131.445 14.732,-131.445 15.129,-131.842 15.129,-133.08 J8_E.1@14.605,-133.604 ; v2(5.334,-112.776) 13.384,-112.776 15.24,-114.632 J8_D.1@15.24,-116.84 ; v2(5.334,-102.87) 6.731,-102.87 J1_C.2@7.239,-102.87 ; v2(5.461,-74.295) J3_B.2@6.604,-74.295 ; v2(5.461,-46.609) J3_A.2@6.858,-46.609 ; v2(5.588,-119.38) 6.985,-119.38 J1_D.2@7.493,-119.38 ; v2(6.223,-94.17) 6.794,-94.742 10.668,-94.742 14.732,-98.806 J8_C.1@14.732,-100.076 ; v2(6.223,-36.957) 6.477,-36.957 6.731,-37.211 8.128,-35.814 U102.4 ; U102.2 U102.4 ; C105.1@14.351,-38.735 13.335,-37.719 12.446,-37.719 ; J2_A.1@14.859,-44.069 14.859,-42.75 13.384,-41.275 11.303,-41.275 11.303,-38.862 12.446,-37.719 ; v2(17.658,-34.163) 17.658,-35.428 17.272,-35.814 U102.4 ; U2_A.7 26.527,-61.103 v2(26.67,-60.96) ; J6_A.2@25.273,-46.355 25.781,-46.355 v2(27.305,-46.355) ; J4_C.2@25.464,-102.87 v2(26.67,-102.87) ; J4_D.2@26.416,-119.38 v2(27.94,-119.38) ; U2_B.7 v2(28.702,-89.408) ; v2(27.051,-136.271) J4_E.2@25.717,-136.271 ; J6_B.2@27.051,-74.295 v2(28.575,-74.295) ; 12.446,-37.719 12.827,-37.338 U102.4 ; J4_E.2@25.717,-136.271 25.146,-136.271 25.019,-136.144 25.511,-136.233 J4_E.2@25.717,-136.271
  Bottom Layer w0.762: v2@4.191,-67.945 2.667,-69.469 2.667,-73.533 3.429,-74.295 v2(5.461,-74.295) 5.461,-75.819 6.223,-76.581 v2(6.223,-94.17) ; v2@4.406,-67.653 6.731,-65.328 6.731,-47.879 v2(5.461,-46.609) 4.191,-46.609 2.667,-45.085 2.667,-40.092 5.3,-37.459 5.721,-37.459 v2(6.223,-36.957) ; v2(5.08,-136.398) 4.318,-136.398 2.54,-134.62 2.54,-131.699 v2(5.334,-128.905) 5.588,-128.651 v2(5.588,-119.38) 4.913,-119.38 3.048,-117.515 3.048,-115.131 5.334,-112.845 v2(5.334,-112.776) v2(5.334,-102.87) 4.064,-102.87 2.794,-101.6 2.794,-97.536 v2@6.159,-94.17 ; v2(17.658,-34.163) 18.928,-35.433 25.781,-35.433 28.531,-38.183 28.531,-39.033 30.099,-40.6 30.099,-43.833 28.083,-45.849 28.083,-46.355 v2(27.305,-46.355) 26.035,-46.355 24.511,-47.879 24.511,-58.801 v2(26.67,-60.96) ; v2(27.051,-136.271) 27.25,-136.271 29.718,-133.803 29.718,-131.572 29.464,-131.318 29.464,-131.151 28.615,-130.302 28.448,-130.302 27.94,-129.794 v2(27.94,-119.38) 28.448,-118.872 28.466,-118.872 29.81,-117.528 29.81,-117.186 30.226,-116.771 30.226,-114.387 26.67,-110.831 v2(26.67,-102.87) 27.702,-102.87 29.536,-101.036 29.464,-100.965 29.464,-90.17 v2(28.702,-89.408) 29.353,-88.757 C3_B.2 29.353,-76.343 28.575,-75.565 v2(28.575,-74.295) 30.099,-74.295 31.623,-72.771 31.623,-70.485 31.369,-70.231 31.369,-69.792 30.03,-68.453 29.591,-68.453 26.67,-65.532 v2(26.67,-60.96) ; C3_A.2@27.305,-60.325 v2(26.67,-60.96)
+7V: C100.1 D1.2 P1.1 U100.1 U101.3 U102.3 | length 53.3
  Top Layer w0.762: U101.3 2.526,-26.258 2.567,-26.258 3.144,-25.681 3.144,-25.558 3.937,-24.765 7.747,-24.765 10.527,-27.545 U102.3@10.527,-28.589 ; P1.1 6.096,-13.335 7.62,-14.859 11.126,-14.859 13.285,-17.018 C100.1 ; U102.3 U102.3@10.527,-28.589 ; C100.1@13.285,-21.209 13.716,-21.209 13.716,-25.4 12.065,-27.051 ; D1.2 18.923,-29.591 18.923,-27.051 ; U100.1 21.5,-27.051 18.923,-27.051 ; U102.3@10.527,-28.589 12.065,-27.051 ; 12.065,-27.051 18.923,-27.051
GND: 1.25V.1 C2_A.1 C2_B.1 C3_A.1 C3_B.1 C100.2 C101.2 C102.2 C103.1 C104.2 C105.2 J1_A.2 J1_B.2 J7_C.2 J7_D.2 J7_E.2 J_A1.1 J_A2.1 J_B1.1 J_B2.1 J_C1.1 J_C2.1 J_D1.1 J_D2.1 J_E1.1 J_E2.1 P1.2 pad.0@3,-3 pad.0@33,-3 R1_A.1 R1_B.1 R1_C.1 R1_D.1 R1_E.1 R2_A.1 R2_B.1 R2_C.1 R2_D.1 R2_E.1 R6_A.2 R6_B.2 R7_A.2 R7_B.2 R9.1 R10.1 R11.1 R12.1 R14.1 U1_A.2 U1_B.2 U1_C.2 U1_D.2 U1_E.2 U2_A.4 U2_B.4 U101.1 U102.1 | length 41.1
  Top Layer w0.356: v1(3.81,-50.673) 3.937,-50.8 R1_A.1 ; R1_B.1 v1(3.937,-78.359) ; v1(9.271,-146.05) 9.271,-145.145 R1_E.1 ; R7_A.2 9.414,-63.881 v1(10.527,-63.881) ; R7_B.2 9.779,-90.011 v1(9.779,-90.805) ; R1_C.1 10.033,-110.22 v1(10.033,-111.633) ; v1(10.541,-127.889) R1_D.1 ; v1(11.43,-102.362) 12.368,-102.362 J7_C.2@12.876,-102.362 ; v1(11.446,-46.355) J1_A.2@12.573,-46.355 ; v1(11.557,-74.295) 12.7,-74.295 J1_B.2@13.208,-74.295 ; v1(12.319,-118.872) 13.462,-118.872 J7_D.2@13.97,-118.872 ; v1(13.081,-143.51) U1_E.2 ; v1(13.97,-80.645) U1_B.2@14.854,-80.645 ; v1(14.097,-108.458) U1_C.2 ; v1(14.589,-52.197) U1_A.2@15.616,-52.197 ; v1(14.859,-125.73) U1_D.2 ; U102.1 15.127,-28.18 v1(15.24,-28.067) ; C2_A.1@15.621,-63.357 16.129,-63.865 v1(16.129,-64.389) ; v1(17.145,-90.805) C2_B.1@17.145,-89.519 ; C105.2 v1(18.669,-38.481) ; v1(18.874,-64.135) 19.637,-64.135 U2_A.4 ; v1(20.955,-92.075) 22.161,-92.075 U2_B.4 ; v1(21.463,-34.163) 22.479,-35.179 C103.1 ; v1(22.987,-128.524) R2_D.1 ; v1(23.051,-145.923) 23.051,-144.827 R2_E.1 ; R6_A.2 28.813,-65.643 v1(29.591,-66.421) ; v1(28.956,-111.252) R2_C.1 ; R6_B.2 30.369,-94.361 v1(30.48,-94.361) ; v1(31.115,-66.548) R2_A.1 ; R2_B.1 32.131,-93.964 v1(32.131,-94.996) ; v1(33.655,-38.735) C101.2
  other v1: 10.654,-145.796 10.922,-141.224 28.702,-140.462 11.684,-135.89 33.122,-130.962 30.226,-128.016 34.036,-117.221 12.954,-111.252 20.574,-111.252 28.321,-105.283 4.064,-93.091 4.318,-89.916 3.937,-84.201 10.795,-82.804 10.287,-79.756 33.909,-78.486 22.987,-72.771 33.147,-69.723 32.512,-64.008 14.351,-63.627 14.097,-54.991 29.972,-53.721 11.557,-52.959 2.413,-49.53 31.623,-42.418 0.762,-39.243 35,-32.421 7.126,-26.035 29.21,-25.4 2.159,-25.273 15.113,-24.257 19.939,-22.606 4.699,-21.844 32.131,-21.463 18.034,-19.685 26.543,-18.907 28.702,-18.907 33.147,-18.669
Net1.25V_2: 1.25V.2 2V.2 3V.2 4V.2 C101.1 D2.1 R8.1 U100.4 | length 52.2
  Top Layer w0.356: 1.25V.2 2V.2 27.272,-10.033 3V.2 4V.2@30.894,-10 ; U100.4 27.723,-25.691 30.127,-28.095 D2.1 32.655,-31.623 ; 4V.2 4V.2@30.894,-10 ; C101.1 32.655,-33.411 32.655,-31.623 ; 4V.2@30.894,-10 30.099,-10.795 30.099,-19.431 30.988,-20.32 32.512,-20.32 33.401,-21.209 33.401,-24.257 34.29,-25.146 34.29,-29.083 34.052,-29.321 R8.1 32.655,-31.623
Net2V_1: 2V.1 R13.2 | length 4.4
  Top Layer w0.356: R13.2 23.241,-15.732 2V.1
Net3V_1: 3V.1 R11.2 R12.2 | length 6.6
  Top Layer w0.356: R11.2 28.067,-16.256 ; 3V.1 27.305,-15.494 28.067,-16.256 ; R12.2 28.083,-16.272 28.067,-16.256
Net4V_1: 4V.1 R9.2 R10.2 | length 5.8
  Top Layer w0.356: 4V.1 31.623,-15.51 R9.2 R10.2
NetC1_A_1: C1_A.1 R3_A.1 R4_A.2 R7_A.1 | length 12
  Top Layer w0.356: R3_A.1 7.985,-61.738 R7_A.1 10.557,-60.452 R4_A.2 11.827,-65.151 C1_A.1@12.589,-65.913
NetC1_A_2: C1_A.2 J11_A.1 R5_A.2 R6_A.1 U2_A.6 | length 28
  Top Layer w0.356: C1_A.2@14.589,-65.913 C1_A.2 21.463,-65.913 22.479,-64.897 22.479,-62.881 22.987,-62.373 U2_A.6 27.019,-62.373 ; R6_A.1 27.051,-62.373 27.019,-62.373 ; J11_A.1@33.655,-54.737 31.631,-56.761 31.631,-59.047 29.607,-61.071 R5_A.2 27.019,-62.373
NetC1_B_1: C1_B.1 R3_B.1 R4_B.2 R7_B.1 | length 12.8
  Top Layer w0.356: R3_B.1 8.763,-86.995 R7_B.1 10.287,-86.995 R4_B.2 12.319,-87.011 12.319,-89.773 C1_B.1@15.129,-92.583
NetC1_B_2: C1_B.2 J11_B.1 R5_B.2 R6_B.1 U2_B.6 | length 24.6
  Top Layer w0.356: C1_B.2@17.129,-92.583 18.145,-93.599 23.622,-93.599 24.495,-92.726 24.495,-91.647 25.464,-90.678 U2_B.6 29.686,-90.678 30.48,-89.884 30.48,-88.138 30.734,-88.138 32.131,-86.741 32.131,-84.201 33.401,-82.931 J11_B.1@33.401,-82.55
NetC2_A_2: C2_A.2 R4_A.1 U2_A.3 | length 7.1
  Top Layer w0.356: R4_A.1 15.097,-60.452 16.383,-61.738 17.542,-61.738 18.177,-62.373 U2_A.3
NetC2_B_2: C2_B.2 R4_B.1 U2_B.3 | length 10.6
  Top Layer w0.356: R4_B.1 14.859,-87.519 19.193,-87.519 19.431,-87.757 19.431,-89.662 20.447,-90.678 U2_B.3
NetJ1_A_1: J1_A.1 J2_A.2 U1_A.5 | length 10.6
  Top Layer w0.356: J2_A.2@13.081,-44.069 13.081,-44.283 13.799,-45.001 13.808,-45.001 14.478,-45.671 J1_A.1@14.478,-46.355 ; J1_A.1@15.24,-46.355 16.954,-48.069 16.954,-51.752 17.399,-52.197 U1_A.5
NetJ1_B_1: J1_B.1 J2_B.2 U1_B.5 | length 10.8
  Top Layer w0.356: J2_B.2@13.192,-72.009 13.192,-72.501 14.605,-73.914 J1_B.1@14.605,-74.295 ; J1_B.1@15.162,-74.295 15.162,-76.63 16.129,-77.597 16.129,-80.137 16.637,-80.645 U1_B.5
NetJ1_C_1: J1_C.1 J2_C.2 J3_C.1 U1_C.1 | length 12.1
  Top Layer w0.356: J3_C.1@9.144,-99.314 9.144,-101.092 9.144,-102.87 13.782,-107.508 U1_C.1 U1_C.1@15.743,-107.508
NetJ1_D_1: J1_D.1 J2_D.2 J3_D.1 U1_D.1 | length 12.6
  Top Layer w0.356: J3_D.1@9.398,-115.824 9.398,-117.602 9.398,-119.253 14.925,-124.78 U1_D.1 U1_D.1@16.251,-124.78
NetJ1_E_1: J1_E.1 J2_E.2 J3_E.1 U1_E.1 | length 12.8
  Top Layer w0.356: J3_E.1@8.382,-132.588 8.89,-132.588 8.89,-134.62 8.89,-136.398 13.9,-141.408 13.9,-142.413 14.047,-142.56 U1_E.1
NetJ3_A_1: J3_A.1 J4_A.2 J5_A.1 U1_A.1 | length 13.4
  Top Layer w0.356: J5_A.1@8.763,-43.053 9.271,-43.053 9.271,-44.831 J3_A.1@9.271,-46.609 ; J3_A.1@8.89,-46.609 8.9,-46.547 8.904,-46.527 8.917,-46.488 J3_A.1@8.93,-46.449 ; J4_A.2@9.144,-45.085 9.137,-45.126 J4_A.2@9.206,-45.222 ; J3_A.1@9.398,-46.609 9.398,-48.514 12.131,-51.247 U1_A.1
NetJ3_B_1: J3_B.1 J4_B.2 J5_B.1 U1_B.1 | length 13.1
  Top Layer w0.356: J5_B.1@9.017,-70.739 9.017,-72.517 9.017,-74.295 9.017,-77.089 11.623,-79.695 U1_B.1
NetJ4_C_1: J4_C.1 J5_C.2 J6_C.1 U1_C.6 | length 11
  Top Layer w0.356: U1_C.6@18.293,-107.508 U1_C.6 18.921,-107.508 23.559,-102.87 23.051,-102.362 23.051,-101.092 J6_C.1@23.051,-99.314
NetJ4_D_1: J4_D.1 J5_D.2 J6_D.1 U1_D.6 | length 11.9
  Top Layer w0.356: U1_D.6@18.801,-124.78 U1_D.6 20.19,-124.78 24.003,-120.967 24.003,-119.38 24.003,-117.602 J6_D.1@24.003,-115.824
NetJ4_E_1: J4_E.1 J5_E.2 J6_E.1 U1_E.6 | length 13.5
  Top Layer w0.356: U1_E.6 19.619,-142.56 23.051,-139.128 J6_E.1@23.051,-132.842
NetJ6_A_1: J6_A.1 J7_A.2 J8_A.1 U1_A.6 | length 10.1
  Top Layer w0.356: U1_A.6 18.476,-51.247 23.368,-46.355 23.368,-44.831 J8_A.1@23.368,-43.307
NetJ6_B_1: J6_B.1 J7_B.2 J8_B.1 U1_B.6 | length 12.8
  Top Layer w0.356: U1_B.6 19.238,-79.695 24.638,-74.295 24.638,-72.517 J8_B.1@24.638,-70.739
NetJ7_C_1: J7_C.1 J8_C.2 U1_C.5 | length 11.3
  Top Layer w0.356: J8_C.2@12.827,-100.076 12.827,-100.838 13.335,-101.346 13.765,-101.346 J7_C.1@14.781,-102.362 ; J7_C.1@14.224,-102.616 17.018,-105.41 17.018,-107.966 17.51,-108.458 U1_C.5@18.293,-108.458
NetJ7_D_1: J7_D.1 J8_D.2 U1_D.5 | length 11.4
  Top Layer w0.356: J8_D.2@13.843,-116.84 13.843,-117.094 15.621,-118.872 J7_D.1@15.875,-118.872 ; J7_D.1@16.002,-119.126 16.002,-121.915 17.526,-123.439 17.526,-125.471 17.785,-125.73 U1_D.5@18.801,-125.73
NetJ7_E_1: J7_E.1 J8_E.2 U1_E.5 | length 12.7
  Top Layer w0.356: J8_E.2@12.7,-133.604 13.716,-134.62 14.384,-134.62 14.605,-134.841 J7_E.1@14.605,-135.89 ; J7_E.1@15.113,-135.857 15.113,-135.89 15.113,-137.795 15.748,-138.43 15.748,-143.256 16.002,-143.51 U1_E.5
NetJ10_A_1: J10_A.1 R3_A.2 | length 23.2
  Top Layer w0.356: R3_A.2@4.699,-60.706 R3_A.2 4.699,-57.15 5.588,-56.261 22.225,-56.261 22.225,-55.626 J10_A.1@22.987,-54.864
NetJ10_A_2: J10_A.2 J_12_A.2 U1_A.4 | length 9.4
  Top Layer w0.356: U1_A.4 21.529,-53.147 22.22,-52.456 22.982,-52.456 22.987,-52.451 24.699,-50.739 J_12_A.2@26.797,-50.739
NetJ10_B_1: J10_B.1 R3_B.2 | length 21.8
  Top Layer w0.356: R3_B.2 4.953,-85.63 6.382,-84.201 18.161,-84.201 19.812,-82.55 J10_B.1@24.13,-82.55
NetJ10_B_2: J10_B.2 J_12_B.2 U1_B.4 | length 10.9
  Top Layer w0.356: U1_B.4 21.529,-81.595 22.987,-80.137 24.13,-80.137 25.654,-78.613 J_12_B.2@27.305,-78.613
NetJ11_A_2: J11_A.2 J_12_A.1 J_A2.2 R2_A.2 | length 19.2
  Top Layer w0.356: J_12_A.1@29.21,-50.739 32.07,-50.739 33.655,-52.324 33.655,-52.832 34.671,-52.832 34.798,-52.959 34.798,-56.261 34.417,-56.642 J_A2.2 34.036,-57.658 31.115,-60.579 R2_A.2
NetJ11_B_2: J11_B.2 J_12_B.1 J_B2.2 R2_B.2 | length 17.9
  Top Layer w0.356: J_12_B.1@29.718,-78.613 31.877,-78.613 33.401,-80.137 34.544,-81.28 J_B2.2 33.81,-85.852 31.877,-87.785 R2_B.2
NetJ_A1_2: J_A1.2 R1_A.2 U1_A.3 | length 16.6
  Top Layer w0.356: J_A1.2 2.159,-55.737 R1_A.2 14.804,-53.959 U1_A.3@15.616,-53.147
NetJ_B1_2: J_B1.2 R1_B.2 U1_B.3 | length 16.4
  Top Layer w0.356: J_B1.2 1.651,-83.677 R1_B.2 4.141,-81.595 U1_B.3 U1_B.3@14.854,-81.595
NetJ_C1_2: J_C1.2 R1_C.2 U1_C.3 | length 14.5
  Top Layer w0.356: J_C1.2 9.779,-108.22 R1_C.2 11.43,-108.093 12.745,-109.408 U1_C.3
NetJ_C2_2: J_C2.2 R2_C.2 U1_C.4 | length 16.4
  Top Layer w0.356: U1_C.4 20.894,-109.408 22.209,-108.093 R2_C.2 34.163,-108.093 J_C2.2
NetJ_D1_2: J_D1.2 R1_D.2 U1_D.3 | length 15.5
  Top Layer w0.356: J_D1.2 9.767,-124.083 R1_D.2 11.319,-124.857 13.142,-126.68 U1_D.3
NetJ_D2_2: J_D2.2 R2_D.2 U1_D.4 | length 16.3
  Top Layer w0.356: U1_D.4 20.005,-126.68 21.574,-125.111 R2_D.2 27.924,-125.111 29.083,-123.952 J_D2.2
NetJ_E1_2: J_E1.2 R1_E.2 U1_E.3 | length 13.8
  Top Layer w0.356: J_E1.2 4.556,-141.732 5.715,-142.891 R1_E.2 10.319,-142.891 11.888,-144.46 U1_E.3
NetJ_E2_2: J_E2.2 R2_E.2 U1_E.4 | length 18.4
  Top Layer w0.356: U1_E.4 19.894,-144.46 21.717,-142.637 R2_E.2 24.4,-141.478 J_E2.2
NetR5_A_1: R5_A.1 U2_A.2 | length 10.9
  Top Layer w0.356: U2_A.2 21.717,-61.103 22.606,-60.214 22.606,-58.547 23.114,-58.039 27.289,-58.039 R5_A.1
NetR5_B_1: R5_B.1 U2_B.2 | length 10.7
  Top Layer w0.356: U2_B.2 23.876,-89.408 24.765,-88.519 24.765,-86.741 26.035,-85.471 R5_B.1@30.353,-85.471
NetR13_1: R13.1 R14.2 | length 2.5
  Top Layer w0.356: R14.2 19.955,-17.018 R13.1
pads on no net: U2_A.1 U2_A.5 U2_A.8 U2_B.1 U2_B.5 U2_B.8 U100.5 U100.6 U100.7 U100.8

## Polygon pours and split planes (outlines as drawn)
GND on Top Layer "TOP GND" (solid, remove dead copper, pour order 5): 0,-151.892 0,0 36,0 36,-151.892
GND on Bottom Layer "bot gnd" (solid, remove dead copper, pour order 6): 0,-151.892 0,0 36,0 36,-151.892

## Silkscreen, mask and mechanical layers (free items; w line width, h text height)
Top Overlay:
  lines w0.5: 0.525,-7.857 0.525,-13.081 15.875,-13.081 ; 0.652,-7.73 3.302,-5.08 32.639,-5.08 35.369,-7.81 ; 10.563,-137.414 10.563,-129.54 ; 10.563,-103.886 10.563,-96.266 ; 10.685,-75.565 10.685,-67.691 ; 10.685,-47.879 10.685,-40.005 ; 11.325,-120.396 11.325,-112.522 ; 15.892,-5.232 15.892,-14.478 35.323,-14.478 35.323,-7.747 ; 21.231,-137.414 21.231,-129.54 ; 21.231,-103.886 21.231,-96.266 ; 21.353,-67.691 21.353,-83.566 35.577,-83.566 35.577,-70.375 32.893,-67.691 3.175,-67.691 0.525,-70.341 0.525,-75.565 35.577,-75.565 ; 21.353,-40.005 21.353,-55.753 35.577,-55.753 35.577,-43.07 32.512,-40.005 3.175,-40.005 0.525,-42.655 0.525,-47.879 35.577,-47.879 ; 21.993,-120.396 21.993,-112.522 ; 0.381,-120.396 35.738,-120.396 35.738,-114.605 33.655,-112.522 2.413,-112.522 0.381,-114.554 0.381,-120.396 ; 0.403,-137.414 0.403,-131.296 2.159,-129.54 33.782,-129.54 35.687,-131.445 35.687,-137.414 0.403,-137.414 ; 0.403,-103.886 0.403,-98.276 2.286,-96.393 33.655,-96.393 35.687,-98.425 35.687,-103.886 0.403,-103.886
  text "Signal_conversion_board_2+3channels" at 4.699,-1.397 h0.8
  text "EMBL // ew2020" at 5.588,-3.683 h0.8
  text "adjustable Voltage" at 18.034,-6.477 h0.8
  text "Power" at 10.541,-6.731 h0.8
  text "Supply" at 10.414,-8.128 h0.8
  text "7V" at 10.668,-9.779 h0.8
  text "+" at 7.62,-10.414 h2
  text "+" at 15.748,-23.114 h2
  text "A Voltage" at 2.667,-41.783 h0.8
  text "B Voltage" at 22.225,-41.783 h0.8
  text "direction" at 13.081,-42.291 h0.8
  text "<----" at 20.129,-43.561 h0.8 r180
  text "3.3V" at 1.397,-43.815 h0.8
  text "3.3V" at 31.369,-43.815 h0.8
  text "adj." at 1.411,-45.339 h0.8
  text "adj." at 31.369,-45.339 h0.8
  text "<----" at 16.383,-46.609 h0.8
  text "5V" at 31.369,-46.863 h0.8
  text "5V" at 1.651,-47.117 h0.8
  text "analogue detour?" at 22.479,-49.403 h0.8
  text "<----" at 34.417,-50.165 h0.8 r180
  text "no" at 27.305,-52.197 h0.8
  text "yes" at 24.638,-54.864 h0.8 r90
  text "yes" at 32.131,-54.864 h0.8 r90
  text "A Voltage" at 2.667,-69.469 h0.8
  text "B Voltage" at 22.225,-69.469 h0.8
  text "direction" at 13.081,-69.977 h0.8
  text "3.3V" at 1.397,-70.993 h0.8
  text "<----" at 20.129,-71.501 h0.8 r180
  text "3.3V" at 31.369,-71.501 h0.8
  text "adj." at 1.411,-73.025 h0.8
  text "adj." at 31.369,-73.025 h0.8
  text "<----" at 16.383,-74.549 h0.8
  text "5V" at 31.369,-74.549 h0.8
  text "5V" at 1.651,-74.803 h0.8
  text "analogue detour?" at 22.479,-77.089 h0.8
  text "no" at 28.067,-80.137 h0.8
  text "yes" at 25.781,-82.423 h0.8 r90
  text "yes" at 32.131,-82.423 h0.8 r90
  text "A Voltage" at 2.545,-97.79 h0.8
  text "B Voltage" at 22.103,-97.79 h0.8
  text "direction" at 12.959,-98.298 h0.8
  text "<----" at 20.066,-99.568 h0.8 r180
  text "3.3V" at 1.275,-99.822 h0.8
  text "3.3V" at 31.247,-99.822 h0.8
  text "adj." at 1.289,-101.346 h0.8
  text "adj." at 31.247,-101.346 h0.8
  text "<----" at 16.256,-102.616 h0.8
  text "5V" at 31.247,-102.87 h0.8
  text "5V" at 1.524,-103.124 h0.8
  text "A Voltage" at 3.307,-114.3 h0.8
  text "B Voltage" at 22.865,-114.3 h0.8
  text "direction" at 13.721,-114.808 h0.8
  text "3.3V" at 2.037,-116.332 h0.8
  text "3.3V" at 32.009,-116.332 h0.8
  text "<----" at 20.828,-116.586 h0.8 r180
  text "adj." at 2.051,-117.856 h0.8
  text "adj." at 32.009,-117.856 h0.8
  text "<----" at 17.018,-119.38 h0.8
  text "5V" at 32.009,-119.38 h0.8
  text "5V" at 2.286,-119.634 h0.8
  text "A Voltage" at 2.545,-131.318 h0.8
  text "B Voltage" at 22.103,-131.318 h0.8
  text "direction" at 12.959,-131.826 h0.8
  text "<----" at 20.066,-133.096 h0.8 r180
  text "3.3V" at 1.275,-133.35 h0.8
  text "3.3V" at 31.247,-133.35 h0.8
  text "adj." at 1.289,-134.874 h0.8
  text "adj." at 31.247,-134.874 h0.8
  text "<----" at 16.256,-136.271 h0.8
  text "5V" at 1.524,-136.398 h0.8
  text "5V" at 31.247,-136.398 h0.8
M1_BoardOutline:
  the board outline again, w0.254
M12_titleBlock:
  lines w0.127: -72.555,-216.141 -72.555,-23.101 ; -72.555,-167.881 -67.475,-167.881 ; -72.555,-119.621 -67.475,-119.621 ; -72.555,-71.361 -67.475,-71.361 ; -67.475,-211.061 -67.475,-28.181 ; 73.495,-216.141 73.495,-211.061 ; 100.165,-211.061 64.605,-211.061 64.605,-180.581 100.165,-180.581 ; 100.901,-203.441 214.465,-203.441 ; 100.901,-195.821 214.465,-195.821 ; 100.901,-188.201 138.265,-188.201 ; 138.265,-211.061 138.265,-195.821 138.265,-180.581 ; 146.52,-216.141 146.52,-211.061 ; 146.52,-28.181 146.52,-23.101 ; 191.605,-211.061 191.605,-195.821 ; 214.465,-167.881 219.545,-167.881 ; 214.465,-119.621 219.545,-119.621 ; 214.465,-71.361 219.545,-71.361 ; 214.465,-28.181 214.465,-211.061 ; 219.545,-216.141 219.545,-23.101 ; 138.265,-180.581 214.465,-180.581 214.465,-211.061 ; 138.265,-180.581 100.901,-180.581 100.901,-211.061 214.465,-211.061
  lines w0.254: 167.259,-179.959 167.259,-30.099 ; 167.259,-89.737 212.979,-89.737 212.979,-87.197 212.979,-68.199 ; 167.259,-68.199 212.979,-68.199 ; 167.259,-63.119 212.979,-63.119 212.979,-68.199
  text "1" at -36.309,-26.53 h1.78